# Altium PCB bh_netlan_0_alph.PcbDoc (part 1 of 2)
Units mm, origin at the board's own origin, x right, y up, seen from the top; angles counter-clockwise.
Board outline 39.5 x 59.44 mm, 2 copper layers (Top Layer, Bottom Layer); 62 components, 42 nets, 232 pads, 67 vias.
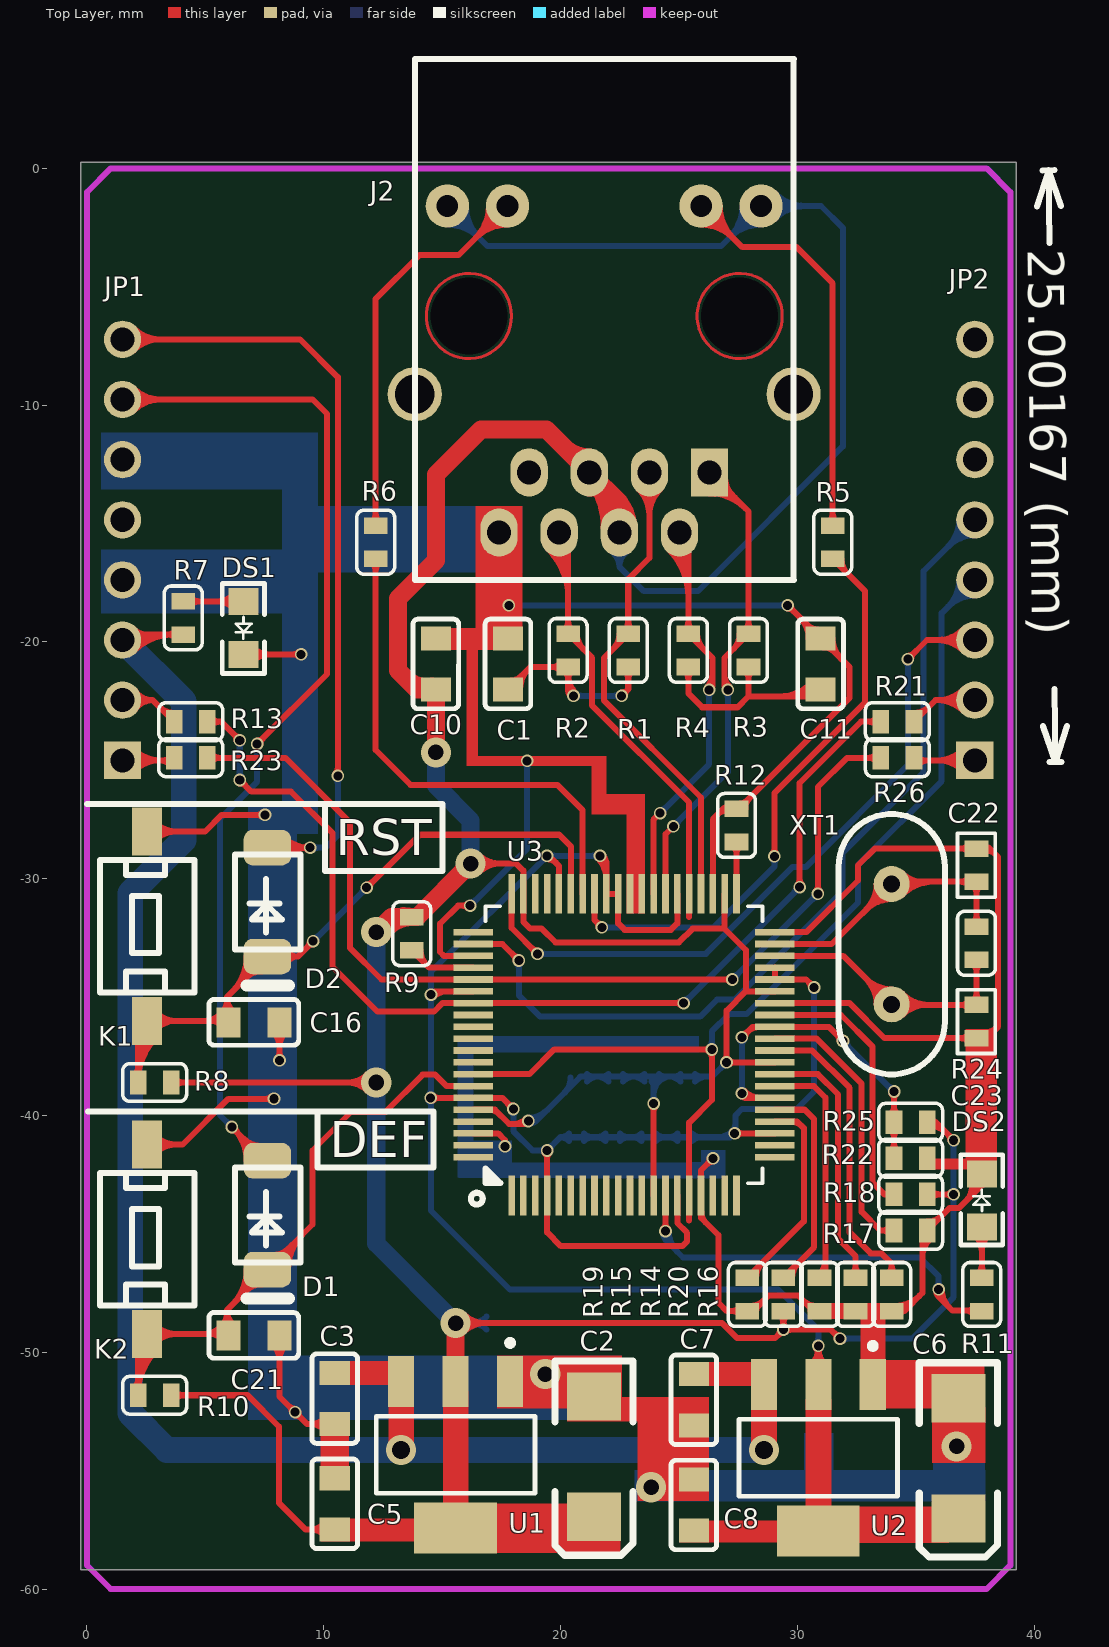
[diagram p0: Top Layer view]
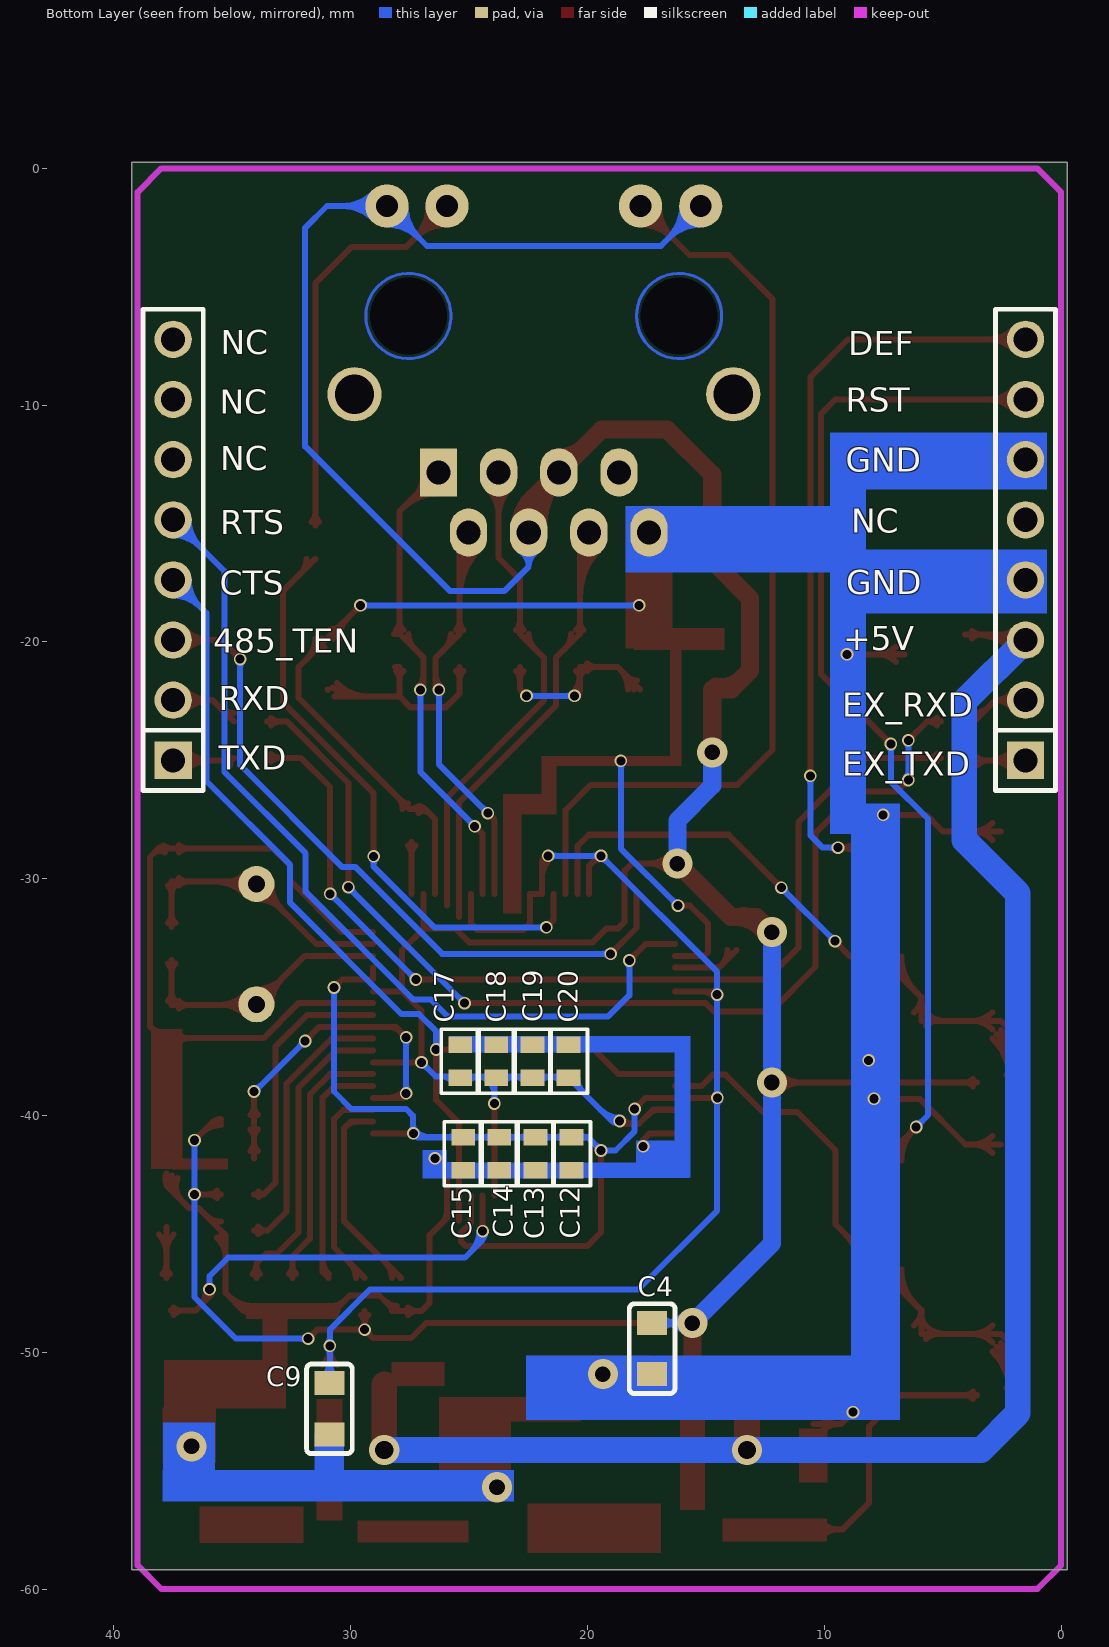
[diagram p1: Bottom Layer view, seen from below]
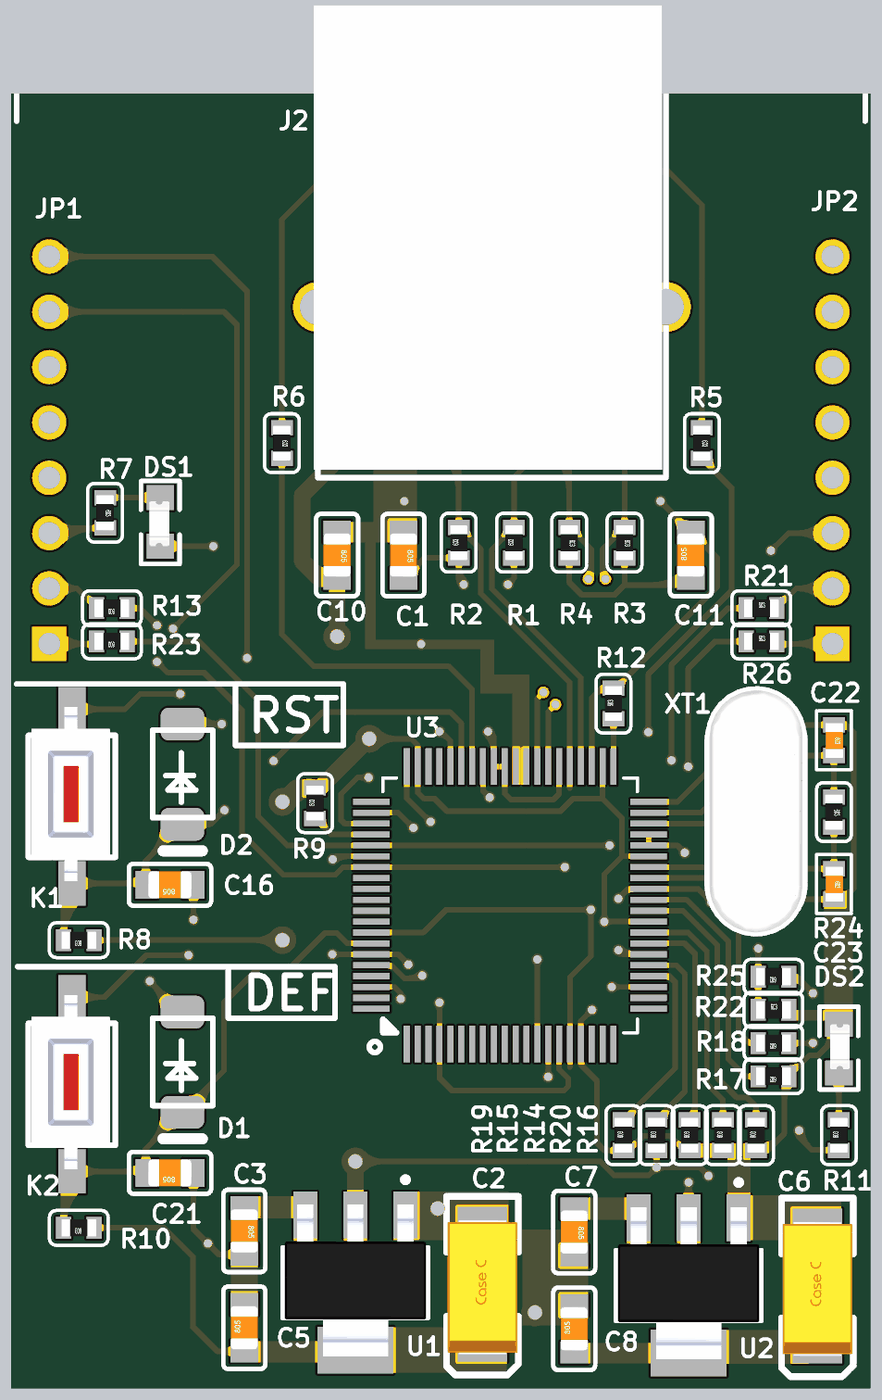
[diagram p3: 3D render of the assembled board from above, using the file's embedded part models]
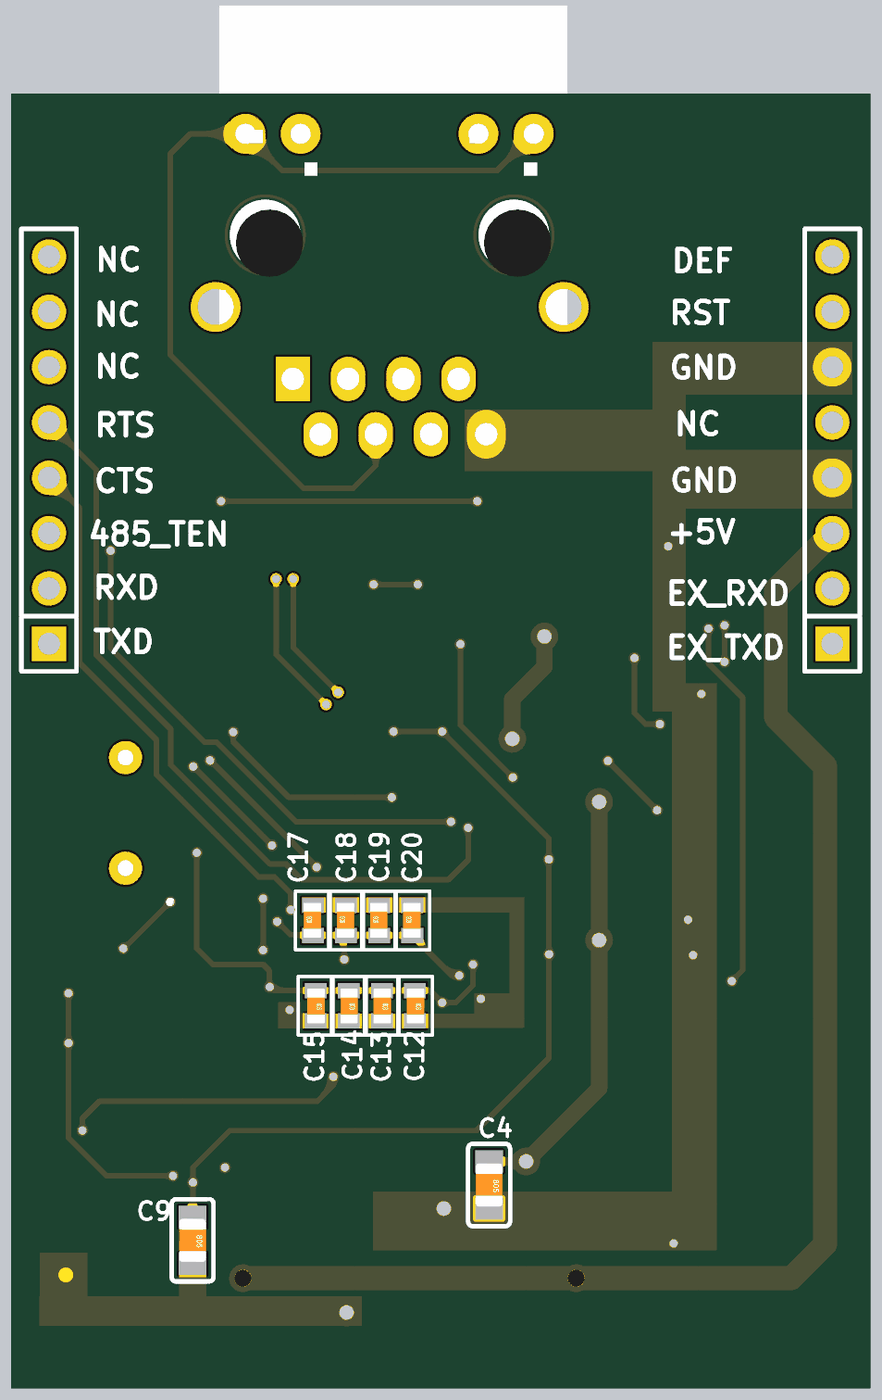
[diagram p4: 3D render of the assembled board from below, using the file's embedded part models]

## Layer stack, top to bottom
Top Layer: signal copper 0.0356
Dielectric: dielectric 0.32, FR-4, Dk 4.8
Bottom Layer: signal copper 0.0356

## Board outline
-0.254,0.254 -0.254,-59.182 39.243,-59.182 39.243,0.254

## Design rules (kind name [scope] priority, off if disabled: settings)
Clearance Clearance_1 [(InPolygon)] p1: gap=0.254
Clearance [All] p2: gap=0.178
DiffPairsRouting [All] p1: maxlimit=0.254 minlimit=0.254 mostfreqgap=0.254 maxuncoupledlength=12.7
HoleSize [All] p1: absolutevalues=TRUE maxlimit=2105.234 minlimit=0.025 maxpercent=80.000 minpercent=20.000
HoleToHoleClearance [All] p1: gap=0 allowstackedmicrovias=TRUE
MinimumSolderMaskSliver [All] p1: minsoldermaskwidth=0
NetAntennae [All] p1: netantennaetolerance=25.4
PolygonConnect PolygonConnect_1 [All vs (InPadClass('All Pads'))] p1: connectstyle=Relief reliefconductorwidth=0.254 reliefentries=4 polygonreliefangle="90 Angle"
PolygonConnect [All] p2: connectstyle=Direct reliefconductorwidth=0.254 reliefentries=4 polygonreliefangle="90 Angle"
RoutingVias [All] p1: holewidth=0.381 width=0.533 viastyle="Through Hole" minholewidth=0.381 minwidth=0.533 maxholewidth=25.4 maxwidth=25.425
SilkToSilkClearance [All] p1: silktosilkclearance=0
SilkscreenOverComponentPads [All] p1: minsilkscreentomaskgap=0
SolderMaskExpansion [All] p1: expansion=0.102
Width [All] p1: maxlimit=2.54 minlimit=0.203 preferedwidth=0.254
21 further rules are at their usual default settings.

## Classes and differential pairs
differential pair NET_RX: +NET_RX_P -NET_RX_N
differential pair NET_TX: +NET_TX_P -NET_TX_N

## Components (designator, comment, footprint, x,y, rotation, side; value= is the part's Value field where it differs from the comment)
C1 "CAP-SMD" C0805 17.78,-19.849 r270 top
C2 "220uf/10V" C6032 21.412,-56.947 r270 top
C3 "0.1uf" C0805 10.465,-50.876 r270 top
C4 "10uf" C0805 17.272,-48.768 r270 bottom
C5 "0.1uf" C0805 10.465,-57.48 r90 top
C6 "220uf/10V" C6032 36.805,-57.023 r270 top
C7 "0.1uf" C0805 25.629,-50.927 r270 top
C8 "10uf" C0805 25.629,-57.531 r90 top
C9 "0.1uf" C0805 30.9,-51.308 r270 bottom
C10 "CAP-SMD" C0805 14.732,-19.849 r270 top
C11 "CAP-SMD" C0805 30.988,-22.008 r90 top
C12 "0.1uf" C0603A 20.676,-40.919 r270 bottom
C13 "0.1uf" C0603A 22.2,-40.919 r270 bottom
C14 "0.1uf" C0603A 23.724,-40.919 r270 bottom
C15 "0.1uf" C0603A 25.248,-40.919 r270 bottom
C16 "CAP-SMD" C0805 8.128,-36.068 r180 top
C17 "0.1uf" C0603A 25.375,-38.405 r90 bottom
C18 "0.1uf" C0603A 23.851,-38.405 r90 bottom
C19 "0.1uf" C0603A 22.327,-38.405 r90 bottom
C20 "0.1uf" C0603A 20.803,-38.405 r90 bottom
C21 "CAP-SMD" C0805 8.128,-49.29 r180 top
C22 "CAP-SMD" C0603A 37.567,-28.727 r270 top
C23 "CAP-SMD" C0603A 37.567,-35.331 r270 top
D1 "IN4007" DO-214(SMA) 7.62,-44.21 r90 top
D2 "IN4007" DO-214(SMA) 7.62,-30.988 r90 top
DS1 "0805" LED(0805) 6.604,-18.288 r270 top
DS2 "0805" LED(0805) 37.792,-44.704 r90 top
J2 "RJ45" RJ45 21.844,-8.484 r90 top locked
JP1 "SIP1X8" SIP1x8x2.54 1.5,-25 r90 top locked
JP2 "SIP1X8" SIP1x8x2.54 37.5,-25 r90 top locked
K1 "3*6*2.5mm" key_2pin 2.54,-32.004 r270 top
K2 "3*6*2.5mm" key_2pin 2.54,-45.226 r270 top
R1 "R0603A" R0603 22.86,-21.06 r90 top
R2 "R0603A" R0603 20.32,-21.06 r90 top
R3 "R0603A" R0603 27.94,-19.66 r270 top
R4 "R0603A" R0603 25.4,-19.66 r270 top
R5 "R0603A" R0603 31.496,-15.088 r270 top
R6 "R0603A" R0603 12.192,-15.088 r270 top
R7 "R0603A" R0603 4.064,-18.288 r270 top
R8 "R0603A" R0603 3.556,-38.608 r180 top
R9 "R0603A" R0603 13.716,-33.02 r90 top
R10 "R0603A" R0603 3.556,-51.816 r180 top
R11 "R0603A" R0603 37.792,-48.26 r90 top
R12 "R0603A" R0603 27.432,-28.448 r90 top
R13 "R0603A" R0603 5.08,-23.368 r180 top
R14 "R0603A" R0603 30.937,-48.26 r90 top
R15 "R0603A" R0603 29.413,-48.26 r90 top
R16 "R0603A" R0603 33.985,-48.26 r90 top
R17 "R0603A" R0603 35.484,-44.856 r180 top
R18 "R0603A" R0603 35.484,-43.332 r180 top
R19 "R0603A" R0603 27.889,-48.26 r90 top
R20 "R0603A" R0603 32.461,-48.26 r90 top
R21 "R0603A" R0603 33.528,-23.368 r0 top
R22 "R0603A" R0603 34.084,-41.808 r0 top
R23 "R0603A" R0603 5.08,-24.892 r180 top
R24 "R0603A" R0603 37.567,-32.029 r270 top
R25 "R0603A" R0603 35.484,-40.284 r180 top
R26 "R0603A" R0603 33.528,-24.892 r0 top
U1 "LM1117-3.3V" SOT-223 15.57,-54.331 r180 top
U2 "LM1117-1.8V" SOT-223 30.886,-54.458 r180 top
U3 "LQFP-80" LQFP-80 22.682,-37.008 r90 top locked
XT1 "25MHz" XTAL/HC-49S 33.985,-35.306 r90 top locked

## Footprints (in the part's own frame and the unit in brackets; to place one, negate y for a bottom-side part, rotate by r counter-clockwise, add the part's x,y. Pads: shape width x height; smd on the part's side, far side on the other; paste and mask are expansions set on the pad)
C0603A [mm]
  rect 0.7x1 smd: 1(0,0) 2(1.4,0)
  silkscreen extent -0.65,-0.8 2.05,0.8, body extent -0.09,-0.38 1.51,0.42, height 0.3
C0805 [mil]
  rect 40x50 smd: 1(0,0) 2(85,0)
  silkscreen extent -32,-38 117,38, body extent 3,-25 82,25, height 30
C6032 [mm]
  rect 2.03x2.286 smd: 1(0,0) 2(-5.08,0)
  silkscreen extent -6.58,-1.65 1.63,1.65, body extent -5.49,-1.6 0.69,1.61, height 2.72
DO-214(SMA) [mm]
  rrect50% 1.5x2 smd: 1(-2.3,0) 2(2.3,0)
  silkscreen extent -3.52,-1.4 2.02,1.37, body extent -2.54,-1.78 2.41,1.65, height 1.52
key_2pin [mm]
  rect 2.032x1.27 smd: 1(-4,0) 2(4,0)
  silkscreen extent -2.8,-2 2.8,2, body extent -4.1,-1.85 3.9,1.75, height 2.5
LED(0805) [mil]
  rect 45x50 smd: A(0,0) K(88,0)
  silkscreen extent -30,-35 120,35, body extent 7,-20 88,16, height 33
LQFP-80 [mm]
  rect 1.676x0.279 smd: 1(-6.37,4.75) 2(-6.37,4.25) 3(-6.37,3.75) 4(-6.37,3.25) 5(-6.37,2.75) 6(-6.37,2.25) 7(-6.37,1.75) 8(-6.37,1.25) 9(-6.37,0.75) 10(-6.37,0.25) 11(-6.37,-0.25) 12(-6.37,-0.75) 13(-6.37,-1.25) 14(-6.37,-1.75) 15(-6.37,-2.25) 16(-6.37,-2.75) 17(-6.37,-3.25) 18(-6.37,-3.75) 19(-6.37,-4.25) 20(-6.37,-4.75) 41(6.37,-4.75) 42(6.37,-4.25) 43(6.37,-3.75) 44(6.37,-3.25) 45(6.37,-2.75) 46(6.37,-2.25) 47(6.37,-1.75) 48(6.37,-1.25) 49(6.37,-0.75) 50(6.37,-0.25) 51(6.37,0.25) 52(6.37,0.75) 53(6.37,1.25) 54(6.37,1.75) 55(6.37,2.25) 56(6.37,2.75) 57(6.37,3.25) 58(6.37,3.75) 59(6.37,4.25) 60(6.37,4.75)
  rect 0.279x1.676 smd: 21(-4.75,-6.37) 22(-4.25,-6.37) 23(-3.75,-6.37) 24(-3.25,-6.37) 25(-2.75,-6.37) 26(-2.25,-6.37) 27(-1.75,-6.37) 28(-1.25,-6.37) 29(-0.75,-6.37) 30(-0.25,-6.37) 31(0.25,-6.37) 32(0.75,-6.37) 33(1.25,-6.37) 34(1.75,-6.37) 35(2.25,-6.37) 36(2.75,-6.37) 37(3.25,-6.37) 38(3.75,-6.37) 39(4.25,-6.37) 40(4.75,-6.37) 61(4.75,6.37) 62(4.25,6.37) 63(3.75,6.37) 64(3.25,6.37) 65(2.75,6.37) 66(2.25,6.37) 67(1.75,6.37) 68(1.25,6.37) 69(0.75,6.37) 70(0.25,6.37) 71(-0.25,6.37) 72(-0.75,6.37) 73(-1.25,6.37) 74(-1.75,6.37) 75(-2.25,6.37) 76(-2.75,6.37) 77(-3.25,6.37) 78(-3.75,6.37) 79(-4.25,6.37) 80(-4.75,6.37)
  silkscreen extent -6.76,-5.85 5.85,6.47, body extent -6.35,-6.43 6.35,6.35, height 1.52
R0603 [mm]
  rect 0.7x1 smd: 1(0,0) 2(1.4,0)
  silkscreen extent -0.65,-0.8 2.05,0.8, body extent -0.1,-0.4 1.5,0.4, height 0.3
RJ45 [mil]
  rect 80x62 hole 40: 1(-171.46,-175.2)
  oval 80x62 hole 40: 2(-271.46,-125.2) 3(-171.46,-75.2) 4(-271.46,-25.2) 5(-171.46,24.8) 6(-271.46,74.8) 7(-171.46,124.8) 8(-271.46,174.8)
  round 72 hole 36: 9(271.46,-260.83) 10(271.46,-161.2) 11(271.46,160.67) 12(271.46,260.8)
  round 90 hole 65: 13(-41.54,314.96) 13(-41.54,-314.96)
  round 116.14 hole 127.95 unplated: MH3(88.54,-225.2) MH3(88.54,224.8)
  Multi-Layer circle w5: c88.54,-225.2 r70.8
  Multi-Layer circle w5: c88.54,224.8 r70.8
  silkscreen extent -350,-315 516,315, body extent -336,-308 503,322, height 528
SIP1x8x2.54 [mil]
  rect 62x62 hole 40: 1(0,0)
  round 62 hole 40: 2(100,0) 3(200,0) 4(300,0) 5(400,0) 6(500,0) 7(600,0) 8(700,0)
SOT-223 [mm] "SOT-223/SC-73; 4 Leads; Body 6.7 x 7.3 mm, inc. leads (LxW max)"
  rect 1.1x2.15 smd: 1(-2.3,-3.1) 2(0,-3.1) 3(2.3,-3.1)
  rect 3.5x2.15 smd: 4(0,3.1)
  silkscreen extent -3.35,-4.85 3.35,1.63, body extent -3.25,-3.58 3.25,3.38, height 1.65
XTAL/HC-49S [mil] "作者：王千会"
  round 60 hole 28: 1(0,0) 2(200,0)
  silkscreen extent -116,-88 316,89, body extent -123,-92 329,92, height 138

## Part data
C1 C10 C11 C16 C21 C22 C23: "SMD-CAP"
C2 C6: library part CAP-T, "钽电容"
C3 C4 C5 C7 C8 C9 C12 C13 C14 C15 C17 C18 C19 C20: library part CAP-SMD, "SMD-CAP"
DS1 DS2: library part LED
JP1 JP2: "8 Pin Header"
K1 K2: library part KEY
R1 R2 R3 R4 R5 R6 R7 R8 R9 R10 R11 R12 R13 R14 R15 R16 R17 R18 R19 R20 R21 R22 R23 R24 R25 R26: library part RES, "Resistor"
U1 U2: library part ASM1117-2.5V, "ASM1117-2.5V"
U3: library part ZLAN1003
XT1: library part XT, "晶振"

## Via types
v1: diameter 0.533, hole 0.381, Top Layer to Bottom Layer, tented both sides, 53 vias
v2: diameter 1.27, hole 0.66, Top Layer to Bottom Layer, tented both sides, 8 vias
v3: diameter 0.533, hole 0.381, Top Layer to Bottom Layer, 4 vias
v4: diameter 1.27, hole 0.762, Top Layer to Bottom Layer, tented both sides, 2 vias

## Nets (pads, with @x,y where several pads share a name; then routed paths per layer and width w, separated by ;. In a path a pad name is that pad's centre, name@x,y a point inside that pad or via, vN(x,y) a via of type N, cw(c..) or ccw(c..) an arc to the next point about the centre after c; other vN are vias at no path point)
485_TEN: JP2.3 U3.60 | length 35.7
  Top Layer w0.254: U3.60@17.932,-30.638 17.932,-32.08 v1(19.025,-33.172) ; v1@18.885,-33.172 ccw(c18.548,-33.172) 18.786,-32.934 ccw(c19.025,-32.695) v1@19.025,-33.033 ; v1(34.671,-20.726) 35.477,-19.92 JP2.3@37.5,-19.92 ; v1@34.671,-20.587 ccw(c34.671,-20.249) 34.909,-20.488 ccw(c35.148,-20.726) v1@34.811,-20.726 ; JP2.3@37.033,-20.387 ccw(c35.906,-21.514) 35.906,-19.92 ccw(c35.906,-18.326) JP2.3@37.033,-19.453 ; JP2.3@37.213,-20.207 ccw(c36.519,-20.901) 36.519,-19.92 ccw(c36.519,-18.939) JP2.3@37.213,-19.633
  Bottom Layer w0.254: v1(19.025,-33.172) 26.137,-33.172 29.794,-29.515 30.353,-29.515 34.671,-25.197 v1(34.671,-20.726) ; v1@19.123,-33.271 cw(c19.362,-33.51) 19.362,-33.172 cw(c19.362,-32.835) v1@19.123,-33.074 ; v1@34.572,-20.825 cw(c34.334,-21.064) 34.671,-21.064 cw(c35.008,-21.064) v1@34.77,-20.825
ACT: R6.2 U3.54 | length 22.2
  Top Layer w0.254: R6.2@12.034,-16.645 cw(c11.654,-17.026) 12.192,-17.026 cw(c12.73,-17.026) R6.2@12.35,-16.645 ; R6.2@12.192,-16.488 12.192,-24.562 13.665,-26.035 19.863,-26.035 20.932,-27.104 U3.54@20.932,-30.638
CTS: JP2.4 U3.16 U3.73 | length 48.6
  Top Layer w0.254: U3.73@16.312,-38.258 18.689,-38.258 19.736,-37.211 v1(26.391,-37.211) 26.391,-39.345 25.432,-40.303 U3.16@25.432,-43.378 25.432,-44.431 ; v1@26.292,-37.112 cw(c26.053,-36.874) 26.053,-37.211 cw(c26.053,-37.548) 26.292,-37.31 cw(c26.053,-37.548) 26.391,-37.548 cw(c26.728,-37.548) v1@26.489,-37.31
  Bottom Layer w0.254: v1@26.292,-37.112 ccw(c26.053,-36.874) 26.391,-36.874 ccw(c26.728,-36.874) v1@26.489,-37.112 ; v1(26.391,-37.211) 26.391,-36.449 27.127,-35.712 27.864,-35.712 32.563,-31.013 32.563,-29.413 36.093,-25.883 36.093,-18.787 JP2.4@37.5,-17.38 ; JP2.4@36.84,-17.38 cw(c35.245,-17.38) 36.373,-18.507 cw(c37.5,-19.635) JP2.4@37.5,-18.04 ; JP2.4@37.094,-17.38 cw(c36.112,-17.38) 36.806,-18.074 cw(c37.5,-18.768) JP2.4@37.5,-17.786
D_DEF: D2.2 JP1.8 | length 42.2
  Top Layer w0.254: JP1.8@1.5,-7.22 8.998,-7.22 10.592,-8.814 v1(10.592,-25.654) ; JP1.8@1.787,-7.507 cw(c2.481,-8.201) 2.481,-7.22 cw(c2.481,-6.239) JP1.8@1.787,-6.933 ; JP1.8@1.967,-7.687 cw(c3.094,-8.814) 3.094,-7.22 cw(c3.094,-5.626) JP1.8@1.967,-6.753 ; D2.2@7.62,-28.688 v1(9.423,-28.688) ; D2.2@8.131,-28.949 cw(c8.761,-29.579) 8.761,-28.688 cw(c8.761,-27.797) D2.2@8.131,-28.427 ; D2.2@8.311,-29.129 cw(c9.374,-30.192) 9.374,-28.688 cw(c9.374,-27.184) D2.2@8.311,-28.247 ; v1@9.325,-28.787 ccw(c9.086,-29.025) 9.086,-28.688 ccw(c9.086,-28.351) v1@9.325,-28.589 ; v1@10.493,-25.555 ccw(c10.255,-25.317) 10.592,-25.317 ccw(c10.929,-25.317) v1@10.691,-25.555
  Bottom Layer w0.254: v1(9.423,-28.688) 10.072,-28.688 10.592,-28.169 v1(10.592,-25.654) ; v1@9.522,-28.787 cw(c9.761,-29.025) 9.761,-28.688 cw(c9.761,-28.351) v1@9.522,-28.589 ; v1@10.493,-25.753 cw(c10.255,-25.991) 10.592,-25.991 cw(c10.929,-25.991) v1@10.691,-25.753
DEF: C16.2 D2.1 K1.2 R8.2 U3.55 | length 43.6
  Top Layer w0.254: R8.2@1.998,-38.3 ccw(c1.618,-37.92) 2.156,-37.92 ccw(c2.694,-37.92) R8.2@2.314,-38.3 ; R8.2@2.156,-38.608 2.156,-36.388 K1.2@2.54,-36.004 5.905,-36.004 5.905,-35.003 ; R8.2@2.156,-38.538 cw(c4.693,-38.538) K1.2@2.899,-36.744 ; 2.156,-37.925 cw(c4.08,-37.925) K1.2@2.72,-36.565 ; 2.156,-37.312 cw(c3.467,-37.312) K1.2@2.54,-36.385 ; K1.2@2.899,-36.363 cw(c3.766,-37.23) 3.766,-36.004 cw(c3.766,-34.778) K1.2@2.899,-35.645 ; 4.897,-36.004 ccw(c4.897,-34.869) 5.7,-35.672 ccw(c5.204,-35.176) 5.905,-35.176 ; 5.201,-36.004 cw(c5.201,-36.709) C16.2@5.7,-36.21 ; 6.13,-34.778 ccw(c4.639,-33.288) D2.1@6.747,-33.288 ; C16.2@6.21,-35.646 cw(c6.735,-35.003) 5.905,-35.003 ; 6.563,-34.345 ccw(c5.507,-33.288) D2.1@7.001,-33.288 ; 6.733,-34.175 cw(c7.37,-34.811) D2.1@7.37,-33.911 ; D2.1@8.421,-33.578 cw(c8.901,-33.83) 8.901,-33.288 ; D2.1@8.421,-32.998 ccw(c8.901,-32.746) 8.901,-33.288 ; v1@9.411,-32.639 cw(c9.073,-32.639) 9.312,-32.877 cw(c9.55,-33.116) v1@9.55,-32.779 ; v1(9.55,-32.639) 8.901,-33.288 ; v1(11.811,-30.378) 14.046,-28.143 19.939,-28.143 20.432,-28.636 U3.55@20.432,-30.638 ; v1@11.811,-30.239 ccw(c11.811,-29.901) 12.049,-30.14 ccw(c12.288,-30.378) v1@11.951,-30.378 ; 5.905,-35.003 D2.1@7.62,-33.288 8.901,-33.288
  Bottom Layer w0.254: v1(9.55,-32.639) v1(11.811,-30.378) ; v1@9.55,-32.499 ccw(c9.55,-32.162) 9.789,-32.401 ccw(c10.027,-32.639) v1@9.69,-32.639 ; v1@11.671,-30.378 cw(c11.334,-30.378) 11.573,-30.617 cw(c11.811,-30.855) v1@11.811,-30.518
EX_RXD0: JP1.2 R13.2 | length 5
  Top Layer w0.254: JP1.2@1.5,-22.46 2.772,-22.46 ; JP1.2@2.04,-22.84 cw(c2.772,-23.355) 2.772,-22.46 ; JP1.2@2.04,-22.08 ccw(c2.772,-21.565) 2.772,-22.46 ; 3.043,-22.731 ccw(c3.68,-22.095) R13.2@3.68,-22.995 ; R13.2@3.68,-23.368 2.772,-22.46
EX_TXD0: JP1.1 R23.2 | length 7.1
  Top Layer w0.254: JP1.1@1.5,-25 3.572,-25 R23.2@3.68,-24.892 ; JP1.1@1.787,-25.287 cw(c2.481,-25.981) 2.481,-25 cw(c2.481,-24.019) JP1.1@1.787,-24.713 ; JP1.1@1.967,-25.467 cw(c3.094,-26.594) 3.094,-25 cw(c3.094,-23.406) JP1.1@1.967,-24.533 ; 3.04,-25 cw(c3.04,-25.682) R23.2@3.522,-25.2 ; 3.243,-25 ccw(c3.243,-24.605) R23.2@3.522,-24.884
GND: C1.1 C2.2 C3.2 C4.2 C5.2 C6.2 C7.2 C8.2 C9.2 C10.1 C11.2 C12.2 C13.2 C14.2 C15.2 C16.1 C17.2 C18.2 C19.2 C20.2 C21.1 C22.1 C23.2 DS1.K DS2.K J2.8 JP1.4 JP1.6 K1.1 K2.1 R12.2 R14.1 R16.1 R17.1 R19.1 R20.1 R22.2 U1.1 U2.1 U3.17 U3.34 U3.40 U3.43 U3.49 U3.50 U3.63 U3.78 | length 148.9
  Top Layer w0.254: K2.1@2.54,-41.226 4.037,-41.226 5.969,-39.294 v1(7.899,-39.294) ; K1.1@2.54,-28.004 4.991,-28.004 5.69,-27.305 v1(7.518,-27.305) ; K2.1@2.899,-41.585 cw(c3.766,-42.453) 3.766,-41.226 cw(c3.766,-40) K2.1@2.899,-40.867 ; K1.1@2.899,-28.363 cw(c3.766,-29.23) 3.766,-28.004 cw(c3.766,-26.778) K1.1@2.899,-27.645 ; DS1.K@6.604,-20.523 v1(9.042,-20.523) ; DS1.K@6.982,-20.838 cw(c7.741,-21.596) 7.741,-20.523 cw(c7.741,-19.45) DS1.K@6.982,-20.209 ; v1@7.42,-27.404 ccw(c7.181,-27.642) 7.181,-27.305 ccw(c7.181,-26.968) v1@7.42,-27.206 ; v1@7.801,-39.393 ccw(c7.562,-39.631) 7.562,-39.294 ccw(c7.562,-38.957) v1@7.801,-39.195 ; C21.1@7.859,-49.687 cw(c7.208,-50.337) 8.128,-50.337 cw(c9.048,-50.337) C21.1@8.397,-49.687 ; C16.1@7.859,-36.464 cw(c7.208,-37.115) 8.128,-37.115 cw(c9.048,-37.115) C16.1@8.397,-36.464 ; v1@8.029,-37.569 ccw(c7.791,-37.331) 8.128,-37.331 ccw(c8.465,-37.331) v1@8.227,-37.569 ; C21.1@8.128,-49.29 8.128,-51.867 9.296,-53.035 C3.2@10.465,-53.035 ; v1(8.128,-37.668) C16.1@8.128,-36.068 ; v1@8.651,-52.529 ccw(c8.314,-52.529) 8.552,-52.291 ccw(c8.791,-52.053) v1@8.791,-52.39 ; v1@8.791,-52.669 cw(c8.791,-53.006) 9.029,-52.768 cw(c9.268,-52.529) v1@8.93,-52.529 ; v1@8.944,-20.622 ccw(c8.705,-20.86) 8.705,-20.523 ccw(c8.705,-20.186) v1@8.944,-20.424 ; C3.2@10.068,-53.305 ccw(c9.418,-53.955) 9.418,-53.035 ccw(c9.418,-52.115) C3.2@10.068,-52.766 ; v1@16.081,-31.239 ccw(c15.843,-31.478) 15.843,-31.14 ccw(c15.843,-30.803) v1@16.081,-31.042 ; v1(16.18,-31.14) 15.672,-31.14 14.91,-31.902 14.91,-33.096 15.071,-33.258 U3.63@16.312,-33.258 ; U3.78@16.312,-40.758 17.364,-40.758 17.653,-41.046 v1(17.653,-41.3) ; U3.17@25.945,-44.076 ccw(c26.566,-44.076) 26.127,-44.515 ; v1@26.302,-41.808 cw(c25.964,-41.808) 26.203,-42.047 cw(c26.441,-42.285) v1@26.441,-41.948 ; U3.43@26.432,-30.638 26.432,-27.492 26.876,-27.048 ; v1(26.441,-41.808) 25.932,-42.318 U3.17@25.932,-43.378 25.932,-44.321 26.67,-45.059 26.67,-47.904 27.026,-48.26 R19.1@27.889,-48.26 28.132,-48.26 28.787,-47.605 30.039,-47.605 30.694,-48.26 R14.1@30.937,-48.26 ; 26.653,-27.272 cw(c27.268,-27.887) R12.2@27.283,-27.017 ; 26.673,-27.251 cw(c26.924,-27.502) R12.2@27.144,-27.223 ; R12.2@27.094,-27.168 ccw(c26.876,-27.306) 26.876,-27.048 ; R12.2@27.094,-26.928 cw(c26.876,-26.79) 26.876,-27.048 ; R12.2@27.301,-27.024 ccw(c27.102,-27.276) 26.875,-27.049 ; R19.1@27.582,-48.418 ccw(c27.201,-48.798) 27.201,-48.26 ccw(c27.201,-47.722) R19.1@27.582,-48.102 ; R12.2@27.582,-26.825 ccw(c27.582,-26.431) R12.2@27.86,-26.71 ; R12.2@27.805,-27.048 cw(c28.488,-27.048) 28.005,-26.565 ; R19.1@28.039,-48.037 ccw(c28.039,-47.274) 28.579,-47.814 ; R19.1@28.262,-48.26 cw(c28.576,-48.26) R19.1@28.354,-48.038 ; U3.34@29.052,-35.258 32.21,-35.258 33.683,-36.731 C23.2@37.567,-36.731 37.995,-36.731 38.481,-36.246 ; U3.40@29.052,-32.258 30.379,-32.258 32.563,-30.074 32.563,-29.439 33.274,-28.727 C22.1@37.567,-28.727 38.125,-28.727 ; v1@29.591,-18.592 cw(c29.591,-18.929) 29.829,-18.69 cw(c30.068,-18.452) v1@29.731,-18.452 ; v1(29.591,-18.452) C11.2@30.988,-19.849 32.207,-21.068 32.207,-22.363 27.522,-27.048 R12.2@27.432,-27.048 26.876,-27.048 ; 30.121,-18.982 cw(c29.254,-19.849) C11.2@30.48,-19.849 ; 30.248,-47.814 ccw(c30.787,-47.274) R14.1@30.787,-48.037 ; 30.427,-19.288 ccw(c30.861,-18.855) C11.2@30.861,-19.468 ; R14.1@30.472,-48.038 cw(c30.25,-48.26) R14.1@30.564,-48.26 ; C11.2@30.554,-19.415 cw(c30.121,-19.849) C11.2@30.734,-19.849 ; C11.2@31.115,-20.23 cw(c31.115,-20.843) 31.549,-20.41 ; C11.2@31.242,-19.849 ccw(c31.855,-19.849) C11.2@31.422,-20.283 ; C11.2@31.496,-19.849 ccw(c32.722,-19.849) 31.855,-20.716 ; R16.1@33.985,-48.26 34.519,-48.26 ; R16.1@34.135,-48.291 ccw(c34.135,-47.44) 34.737,-48.042 ; R16.1@34.135,-48.037 ccw(c34.135,-46.573) 35.17,-47.608 ; R16.1@34.329,-48.37 cw(c34.519,-48.478) 34.519,-48.26 ; R16.1@34.329,-48.15 ccw(c34.519,-48.042) 34.519,-48.26 ; 35.281,-46.035 cw(c36.513,-46.035) R17.1@35.641,-45.164 ; 35.281,-45.422 cw(c35.9,-45.422) R17.1@35.462,-44.984 ; R17.1@35.484,-44.483 ccw(c35.484,-43.583) 36.121,-44.22 ; 37.111,-43.632 ccw(c36.456,-42.977) DS2.K@37.316,-42.634 ; C23.2@37.259,-36.889 ccw(c36.878,-37.27) 36.878,-36.731 ccw(c36.878,-36.193) C23.2@37.259,-36.574 ; C22.1@37.259,-28.885 ccw(c36.878,-29.266) 36.878,-28.727 ccw(c36.878,-28.189) C22.1@37.259,-28.57 ; 37.383,-43.359 ccw(c36.845,-42.821) DS2.K@37.552,-42.539 ; 37.656,-43.086 ccw(c37.235,-42.666) DS2.K@37.787,-42.445 ; C22.1@37.697,-28.703 cw(c37.898,-28.958) 38.127,-28.729 ; C23.2@37.713,-36.762 ccw(c37.763,-36.283) 38.103,-36.624 ; C22.1@37.714,-28.697 cw(c37.786,-29.428) 38.306,-28.908 ; C23.2@37.739,-36.51 ccw(c37.833,-35.598) 38.481,-36.246 ; DS2.K@37.792,-42.469 37.792,-42.95 36.838,-43.904 36.436,-43.904 R17.1@35.484,-44.856 35.281,-45.06 35.281,-47.498 34.519,-48.26 ; C22.1@37.854,-28.903 cw(c38.076,-29.186) 38.33,-28.932 ; C22.1@37.904,-28.848 cw(c38.125,-28.991) 38.125,-28.727 ; C22.1@37.904,-28.607 ccw(c38.125,-28.464) 38.125,-28.727 ; 38.125,-28.727 38.481,-29.083 38.481,-36.246
  Bottom Layer w0.254: v1(16.18,-31.14) 18.593,-28.727 v1(18.593,-25.019) ; v1@16.18,-31.001 ccw(c16.18,-30.663) 16.418,-30.902 ccw(c16.657,-31.14) v1@16.319,-31.14 ; v1(17.817,-18.452) v1(29.591,-18.452) ; v1@17.916,-18.551 cw(c18.154,-18.789) 18.154,-18.452 cw(c18.154,-18.115) v1@17.916,-18.353 ; v1@18.494,-25.118 cw(c18.256,-25.356) 18.593,-25.356 cw(c18.93,-25.356) v1@18.692,-25.118 ; v1@29.492,-18.551 ccw(c29.254,-18.789) 29.254,-18.452 ccw(c29.254,-18.115) v1@29.492,-18.353
  other v1: 8.791,-52.529
  other v2: 23.825,-55.702 36.728,-53.975 19.355,-50.927
LINK: R5.2 U3.53 | length 27.9
  Top Layer w0.254: U3.53@21.432,-30.638 21.432,-31.745 v1(21.742,-32.055) ; v1@21.603,-32.055 ccw(c21.265,-32.055) 21.504,-31.816 ccw(c21.742,-31.578) v1@21.742,-31.915 ; v1@28.933,-28.959 ccw(c28.695,-28.72) 29.032,-28.72 ccw(c29.369,-28.72) v1@29.131,-28.959 ; v1(29.032,-29.058) 29.032,-26.391 32.868,-22.555 32.868,-17.859 R5.2@31.496,-16.488 ; R5.2@31.869,-16.488 ccw(c32.769,-16.488) 32.133,-17.124
  Bottom Layer w0.254: v1(21.742,-32.055) 26.467,-32.055 29.032,-29.489 v1(29.032,-29.058) ; v1@21.841,-32.154 cw(c22.08,-32.392) 22.08,-32.055 cw(c22.08,-31.718) v1@21.841,-31.956 ; v1@28.933,-29.156 cw(c28.695,-29.395) 29.032,-29.395 cw(c29.369,-29.395) v1@29.131,-29.156
NET_RX_N: J2.6 R2.2 U3.45 | length 26.4
  Top Layer w0.254: J2.6@19.477,-16.074 cw(c17.442,-18.109) 20.32,-18.109 ; J2.6@19.657,-15.895 cw(c18.055,-17.496) 20.32,-17.496 ; J2.6@19.836,-15.715 cw(c18.668,-16.883) 20.32,-16.883 ; J2.6@19.944,-15.379 20.32,-15.755 R2.2@20.32,-19.66 21.336,-20.676 21.336,-22.689 25.425,-26.779 25.425,-31.624 25.428,-31.627 25.428,-31.335 25.425,-31.332 U3.45@25.425,-30.638 ; R2.2@20.162,-19.502 ccw(c19.782,-19.121) 20.32,-19.121 ccw(c20.858,-19.121) R2.2@20.478,-19.502 ; R2.2@20.693,-19.66 ccw(c21.593,-19.66) 20.957,-20.296
NET_RX_P: J2.3 R1.2 U3.44 | length 26.9
  Top Layer w0.254: 22.223,-20.296 ccw(c21.587,-19.66) R1.2@22.487,-19.66 ; R1.2@22.702,-19.502 ccw(c22.322,-19.121) 22.86,-19.121 ccw(c23.398,-19.121) R1.2@23.018,-19.502 ; J2.3@23.287,-13.534 cw(c22.16,-14.662) 23.754,-14.662 cw(c25.348,-14.662) J2.3@24.221,-13.534 ; J2.3@23.467,-13.355 cw(c22.773,-14.048) 23.754,-14.048 cw(c24.735,-14.048) J2.3@24.041,-13.355 ; J2.3@23.754,-12.839 23.754,-16.454 22.86,-17.348 R1.2@22.86,-19.66 21.844,-20.676 21.844,-22.479 25.933,-26.568 25.933,-31.122 U3.44@25.932,-30.638
NET_TX_N: J2.2 R4.1 U3.48 | length 25.5
  Top Layer w0.254: U3.48@23.924,-30.638 23.924,-27.516 v3(24.209,-27.232) ; J2.2@24.557,-16.074 cw(c22.522,-18.109) 25.4,-18.109 ; J2.2@24.737,-15.895 cw(c23.135,-17.496) 25.4,-17.496 ; J2.2@24.916,-15.715 cw(c23.748,-16.883) 25.4,-16.883 ; J2.2@25.024,-15.379 25.4,-15.755 R4.1@25.4,-19.66 26.416,-20.676 26.416,-21.882 v3(26.276,-22.022) ; R4.1@25.242,-19.502 ccw(c24.862,-19.121) 25.4,-19.121 ccw(c25.938,-19.121) R4.1@25.558,-19.502 ; R4.1@25.773,-19.66 ccw(c26.673,-19.66) 26.037,-20.296 ; v3@26.178,-21.923 ccw(c25.602,-21.347) 26.416,-21.347
  Bottom Layer w0.254: v3(24.209,-27.232) 26.276,-25.164 v3(26.276,-22.022) ; v3@24.209,-27.092 ccw(c24.209,-26.755) 24.448,-26.993 ccw(c24.686,-27.232) v3@24.349,-27.232 ; v3@26.178,-22.121 cw(c25.939,-22.359) 26.276,-22.359 cw(c26.614,-22.359) v3@26.375,-22.121
NET_TX_P: J2.1 R3.1 U3.47 | length 27.2
  Top Layer w0.254: U3.47@24.432,-30.638 24.432,-28.122 v3(24.766,-27.788) ; J2.1@26.294,-13.728 cw(c26.294,-15.874) 27.812,-14.356 ; J2.1@26.294,-13.474 cw(c26.294,-15.007) 27.378,-13.923 ; J2.1@26.294,-12.839 27.94,-14.485 R3.1@27.94,-19.66 ; 26.924,-21.347 ccw(c27.738,-21.347) v3@27.162,-21.923 ; J2.1@26.954,-13.067 ccw(c27.997,-13.067) 27.26,-13.804 ; v3(27.064,-22.022) 26.924,-21.882 26.924,-20.676 R3.1@27.94,-19.66 ; 27.303,-20.296 ccw(c26.666,-19.66) R3.1@27.567,-19.66 ; R3.1@27.782,-19.502 ccw(c27.402,-19.121) 27.94,-19.121 ccw(c28.478,-19.121) R3.1@28.098,-19.502 ; R3.1@28.169,-19.66 R3.1@27.94,-19.66
  Bottom Layer w0.254: v3(24.766,-27.788) 27.064,-25.49 v3(27.064,-22.022) ; v3@24.766,-27.649 ccw(c24.766,-27.311) 25.004,-27.55 ccw(c25.243,-27.788) v3@24.905,-27.788 ; v3@26.965,-22.121 cw(c26.726,-22.359) 27.064,-22.359 cw(c27.401,-22.359) v3@27.162,-22.121
NetC1_2: C1.2 R1.1 R2.1 | length 14.9
  Top Layer w0.254: C1.2@17.78,-22.008 18.728,-21.06 R2.1@20.32,-21.06 20.32,-22.047 v1(20.549,-22.276) ; C1.2@17.907,-21.627 ccw(c17.907,-21.014) 18.341,-21.447 ; C1.2@18.034,-22.008 cw(c18.647,-22.008) C1.2@18.214,-21.574 ; C1.2@18.288,-22.008 cw(c19.514,-22.008) 18.647,-21.141 ; R2.1@20.012,-21.217 ccw(c19.632,-21.598) 19.632,-21.06 ccw(c19.632,-20.521) R2.1@20.012,-20.902 ; R2.1@20.162,-21.217 cw(c19.782,-21.598) 20.32,-21.598 cw(c20.858,-21.598) R2.1@20.478,-21.217 ; 20.32,-22 ccw(c20.825,-22) v1@20.468,-22.357 ; R2.1@20.32,-21.387 ccw(c21.438,-21.387) v1@20.647,-22.177 ; v1(22.581,-22.276) 22.86,-21.996 R1.1@22.86,-21.06 ; v1@22.581,-22.136 ccw(c22.581,-21.799) 22.819,-22.037 ccw(c23.058,-22.276) v1@22.72,-22.276 ; R1.1@22.702,-21.217 cw(c22.322,-21.598) 22.86,-21.598 cw(c23.398,-21.598) R1.1@23.018,-21.217
  Bottom Layer w0.254: v1(20.549,-22.276) v1(22.581,-22.276) ; v1@20.647,-22.375 cw(c20.886,-22.613) 20.886,-22.276 cw(c20.886,-21.939) v1@20.647,-22.177 ; v1@22.482,-22.375 ccw(c22.243,-22.613) 22.243,-22.276 ccw(c22.243,-21.939) v1@22.482,-22.177
NetC11_1: C11.1 R3.2 R4.2 | length 12.5
  Top Layer w0.254: R4.2@25.242,-21.217 cw(c24.862,-21.598) 25.4,-21.598 cw(c25.938,-21.598) R4.2@25.558,-21.217 ; R4.2@25.4,-21.06 25.4,-22.174 25.984,-22.758 27.483,-22.758 27.94,-22.301 ; R3.2@27.782,-21.217 cw(c27.402,-21.598) 27.94,-21.598 cw(c28.478,-21.598) R3.2@28.098,-21.217 ; R3.2@28.125,-21.06 R3.2@27.94,-21.06 27.94,-22.301 ; 29.233,-22.301 ccw(c29.233,-20.38) C11.1@30.592,-21.739 ; 29.847,-22.301 ccw(c29.847,-20.994) C11.1@30.771,-21.918 ; C11.1@30.695,-22.301 27.94,-22.301 ; C11.1@30.962,-22.034 C11.1@30.988,-22.008
NetC22_2: C22.2 R24.1 U3.39 XT1.2 | length 21.2
  Top Layer w0.254: U3.39@29.052,-32.758 31.453,-32.758 XT1.2@33.985,-30.226 ; XT1.2@33.35,-30.226 cw(c31.817,-30.226) 32.901,-31.31 cw(c33.985,-32.394) XT1.2@33.985,-30.861 ; XT1.2@33.604,-30.226 cw(c32.684,-30.226) 33.335,-30.876 cw(c33.985,-31.527) XT1.2@33.985,-30.607 ; XT1.2@34.084,-30.127 C22.2@37.567,-30.127 R24.1@37.567,-32.029 ; XT1.2@34.255,-30.495 cw(c35.143,-31.384) 35.143,-30.127 ; XT1.2@34.434,-30.675 cw(c35.756,-31.997) 35.756,-30.127 ; XT1.2@34.434,-29.777 ccw(c35.28,-28.931) 35.28,-30.127 ; C22.2@37.259,-30.285 ccw(c36.878,-30.666) 36.878,-30.127 ccw(c36.878,-29.589) C22.2@37.259,-29.97 ; R24.1@37.409,-31.872 ccw(c37.028,-31.491) 37.567,-31.491 ccw(c38.105,-31.491) R24.1@37.724,-31.872 ; C22.2@37.409,-30.285 cw(c37.028,-30.666) 37.567,-30.666 cw(c38.105,-30.666) C22.2@37.724,-30.285
NetC23_1: C23.1 R24.2 U3.38 XT1.1 | length 21.5
  Top Layer w0.254: U3.38@29.052,-33.258 31.937,-33.258 XT1.1@33.985,-35.306 ; XT1.1@33.35,-35.306 ccw(c31.817,-35.306) 32.901,-34.222 ccw(c33.985,-33.138) XT1.1@33.985,-34.671 ; XT1.1@33.604,-35.306 ccw(c32.684,-35.306) 33.335,-34.656 ccw(c33.985,-34.005) XT1.1@33.985,-34.925 ; XT1.1@34.011,-35.331 C23.1@37.567,-35.331 R24.2@37.567,-33.429 ; XT1.1@34.255,-35.575 cw(c34.844,-36.164) 34.844,-35.331 ; XT1.1@34.255,-35.037 ccw(c34.966,-34.325) 34.966,-35.331 ; XT1.1@34.434,-35.755 cw(c35.457,-36.778) 35.457,-35.331 ; XT1.1@34.434,-34.857 ccw(c35.58,-33.712) 35.58,-35.331 ; C23.1@37.259,-35.489 ccw(c36.878,-35.87) 36.878,-35.331 ccw(c36.878,-34.793) C23.1@37.259,-35.174 ; C23.1@37.409,-35.174 ccw(c37.028,-34.793) 37.567,-34.793 ccw(c38.105,-34.793) C23.1@37.724,-35.174 ; R24.2@37.409,-33.587 cw(c37.028,-33.968) 37.567,-33.968 cw(c38.105,-33.968) R24.2@37.724,-33.587
NetDS1_A: DS1.A R7.1 | length 5.1
  Top Layer w0.254: R7.1@4.064,-18.288 DS1.A@6.604,-18.288 ; R7.1@4.372,-18.446 cw(c4.752,-18.826) 4.752,-18.288 cw(c4.752,-17.75) R7.1@4.372,-18.13 ; DS1.A@6.226,-18.602 ccw(c5.467,-19.361) 5.467,-18.288 ccw(c5.467,-17.215) DS1.A@6.226,-17.974
NetDS2_A: DS2.A R11.2 | length 4.7
  Top Layer w0.254: DS2.A@37.478,-45.018 cw(c36.719,-45.777) 37.792,-45.777 cw(c38.865,-45.777) DS2.A@38.106,-45.018 ; R11.2@37.634,-46.702 ccw(c37.254,-46.322) 37.792,-46.322 ccw(c38.33,-46.322) R11.2@37.95,-46.702 ; R11.2@37.792,-46.86 DS2.A@37.792,-44.704
NetJ2_10: J2.10 R5.1 | length 23
  Top Layer w0.254: J2.10@25.938,-2.376 cw(c25.938,-4.277) 27.283,-2.933 cw(c28.627,-1.589) J2.10@26.726,-1.589 ; J2.10@25.938,-2.122 cw(c25.938,-3.41) 26.849,-2.499 cw(c27.76,-1.589) J2.10@26.472,-1.589 ; J2.10@25.938,-1.589 27.677,-3.327 29.972,-3.327 31.496,-4.851 R5.1@31.496,-15.088 ; R5.1@31.338,-14.93 ccw(c30.958,-14.549) 31.496,-14.549 ccw(c32.034,-14.549) R5.1@31.654,-14.93
NetJ2_11: J2.11 R6.1 | length 22.6
  Top Layer w0.254: R6.1@12.034,-14.93 ccw(c11.654,-14.549) 12.192,-14.549 ccw(c12.73,-14.549) R6.1@12.35,-14.93 ; R6.1@12.192,-15.088 12.192,-5.512 14.046,-3.658 15.694,-3.658 J2.11@17.763,-1.589 ; J2.11@16.976,-1.589 cw(c15.075,-1.589) 16.419,-2.933 cw(c17.763,-4.277) J2.11@17.763,-2.376 ; J2.11@17.23,-1.589 cw(c15.942,-1.589) 16.852,-2.499 cw(c17.763,-3.41) J2.11@17.763,-2.122
NetR9_1: R9.1 U3.64 | length 3.6
  Top Layer w0.254: R9.1@13.716,-33.02 14.454,-33.758 U3.64@16.312,-33.758 ; R9.1@14.089,-33.02 ccw(c14.989,-33.02) 14.353,-33.657